# Altium PCB Cap_ESP_ADS1298.PcbDoc
Units mil, origin at the board's own origin, x right, y up, seen from the top; angles counter-clockwise.
Board outline 915 x 1330 mil, 4 copper layers (Top Layer, VDD, GND, Bottom Layer), stack 30.634 mil thick; 110 components, 86 nets, 404 pads, 76 vias.
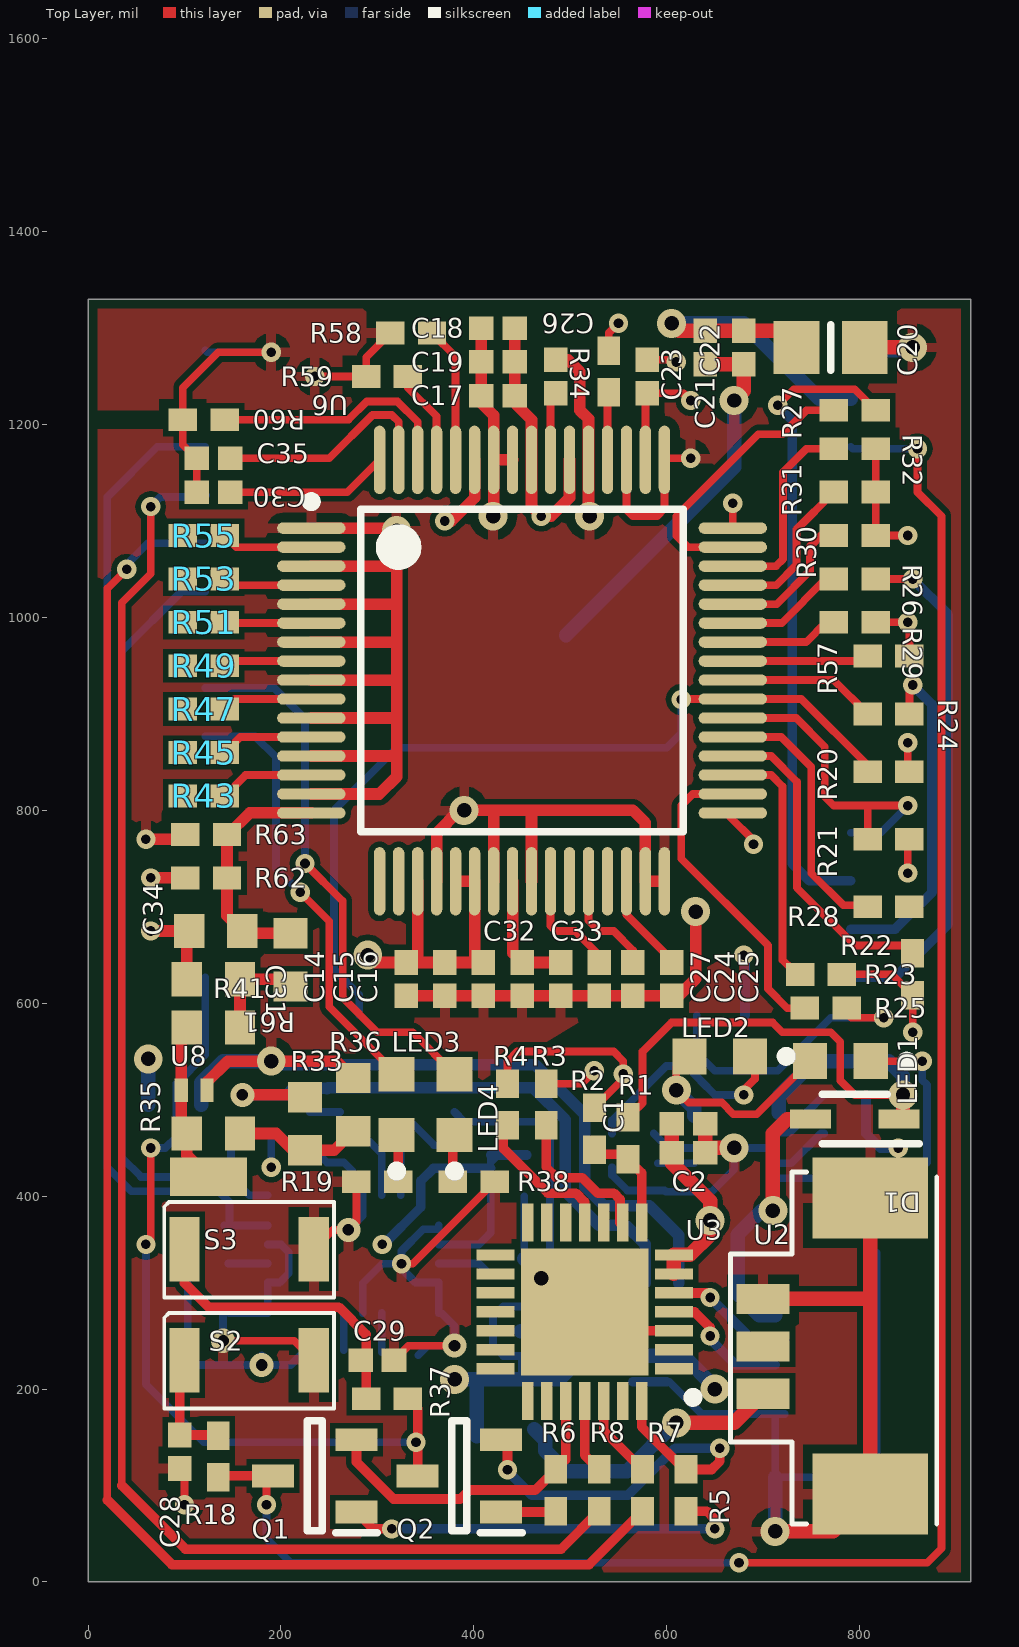
[diagram p0: Top Layer view]
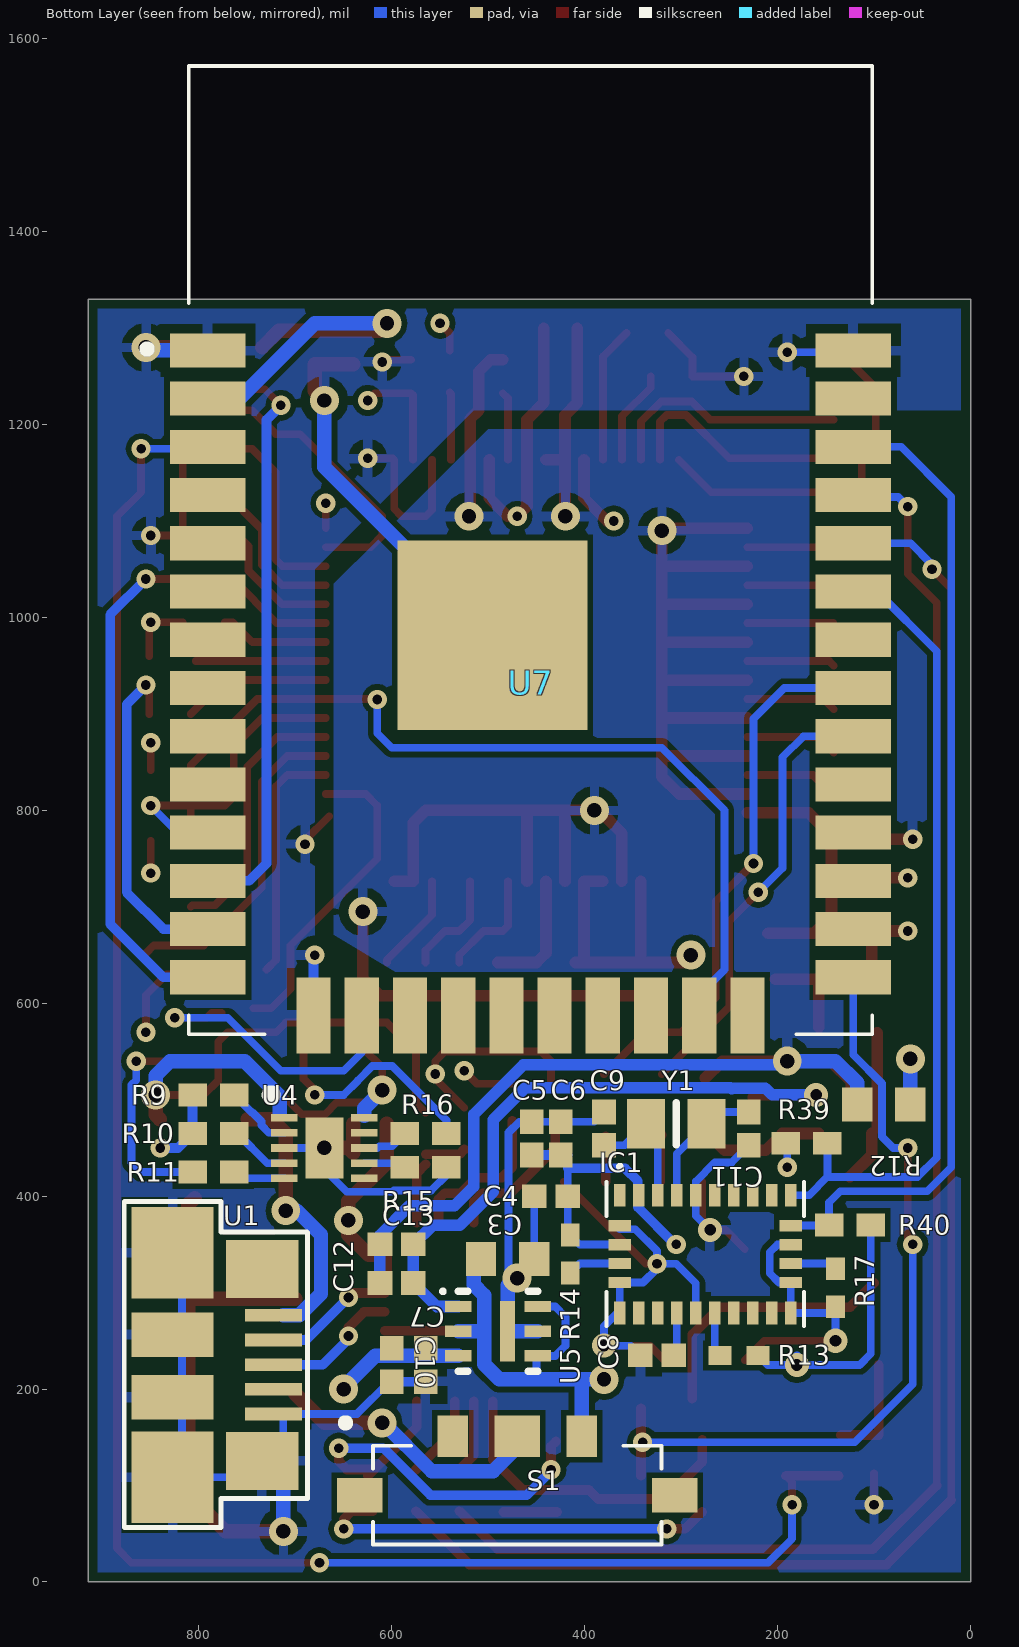
[diagram p1: Bottom Layer view, seen from below]
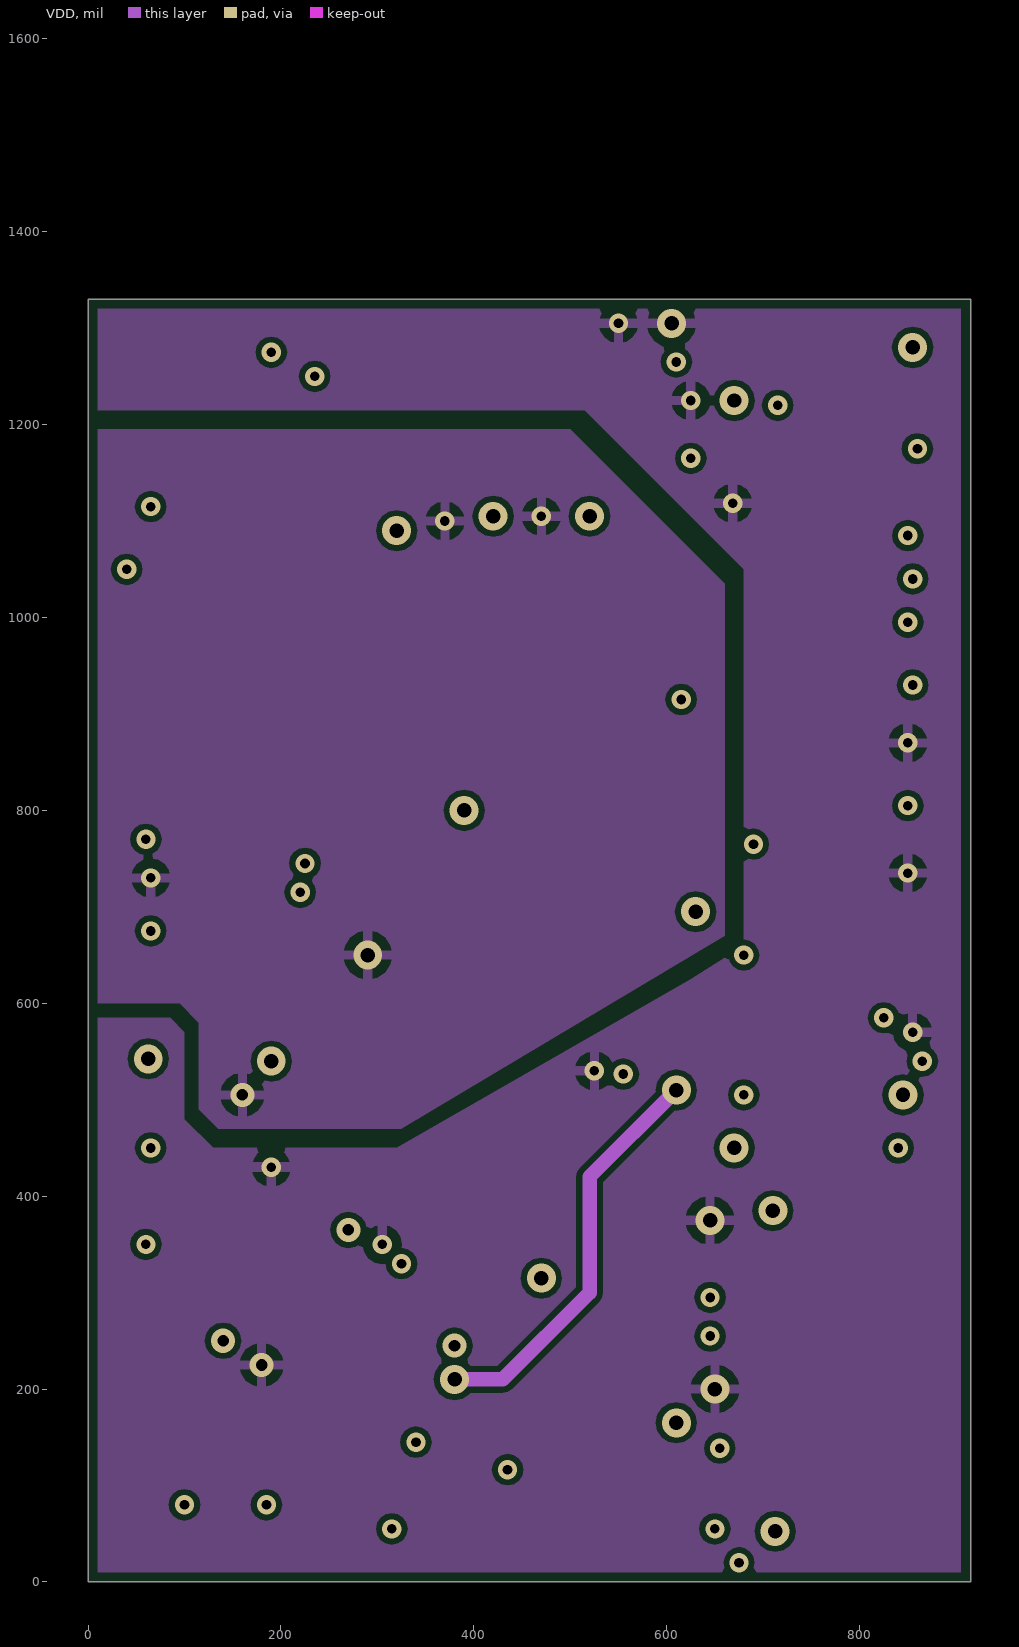
[diagram p2: VDD]
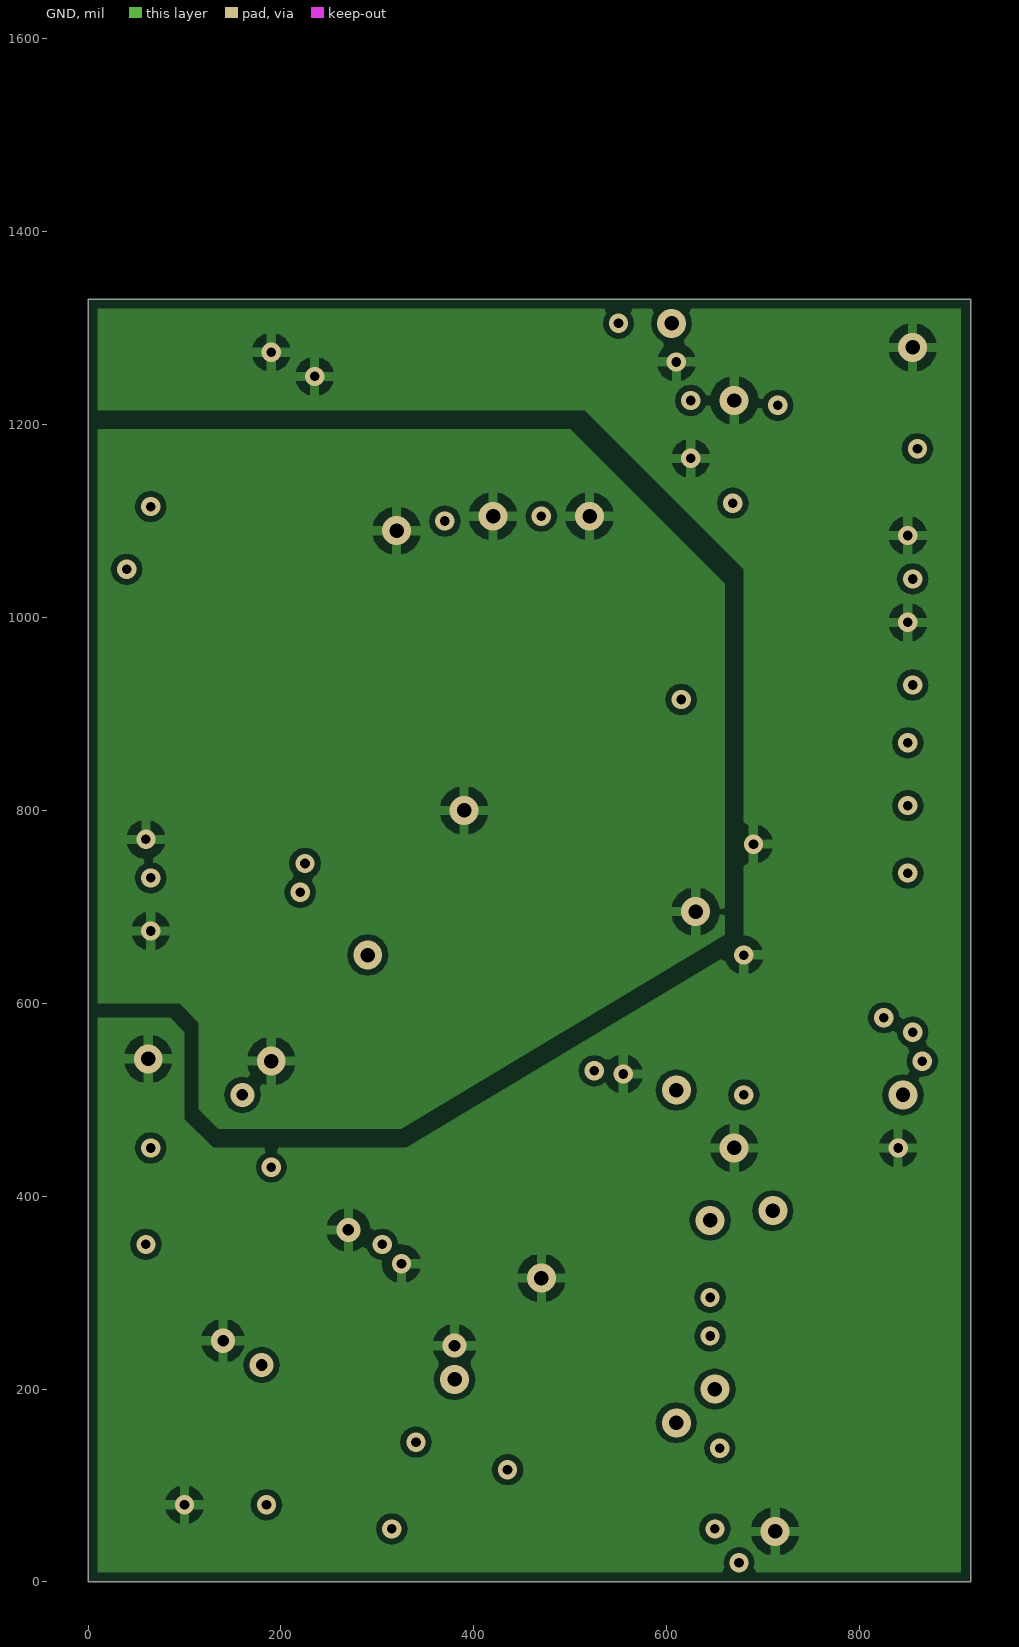
[diagram p3: GND]
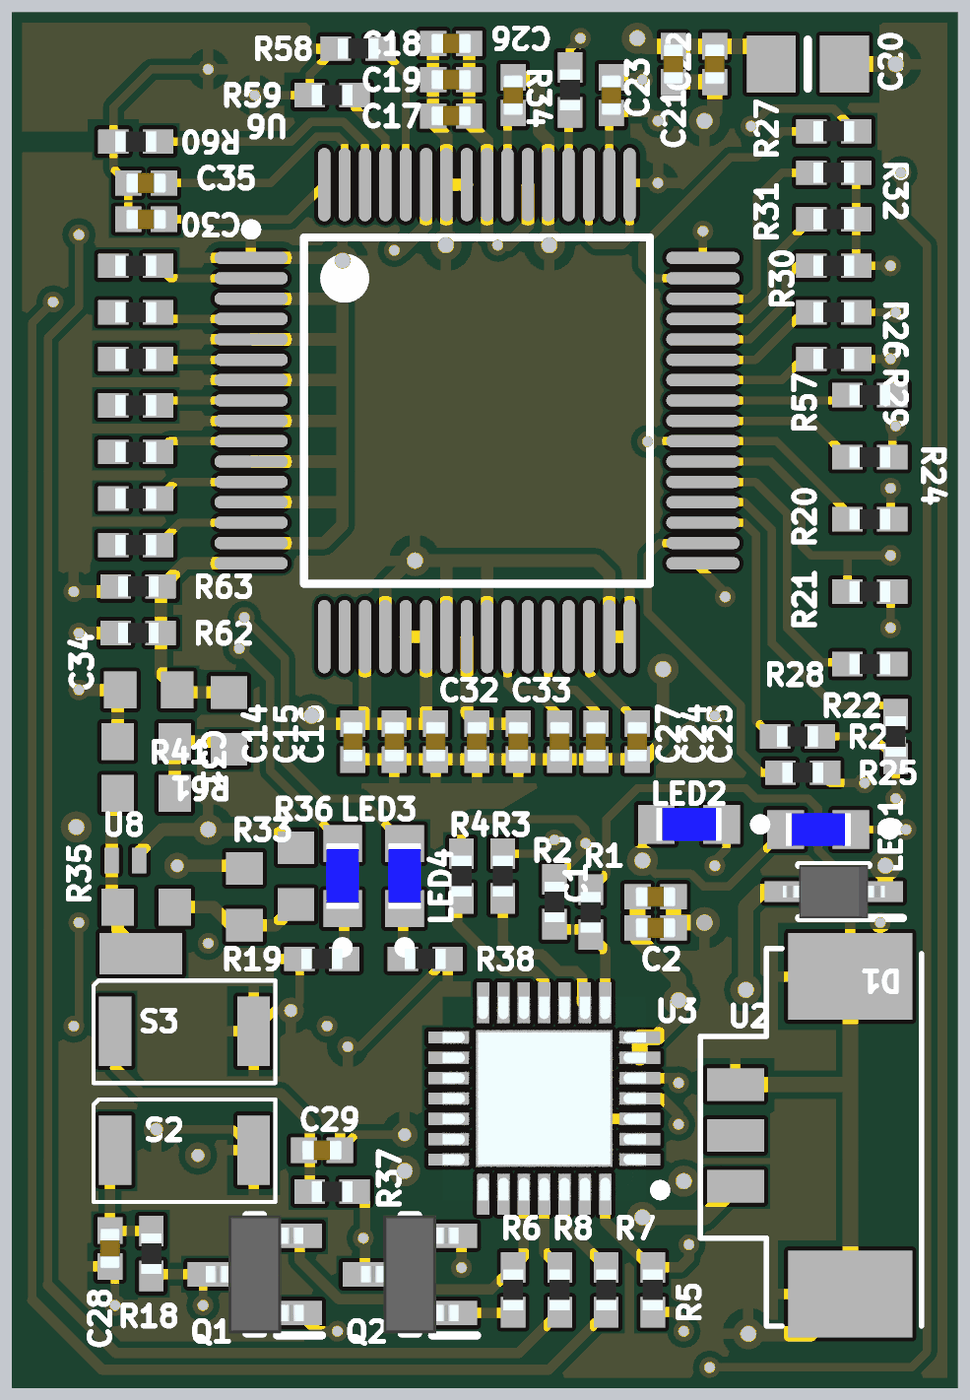
[diagram p4: 3D render of the assembled board from above, using the file's embedded part models]
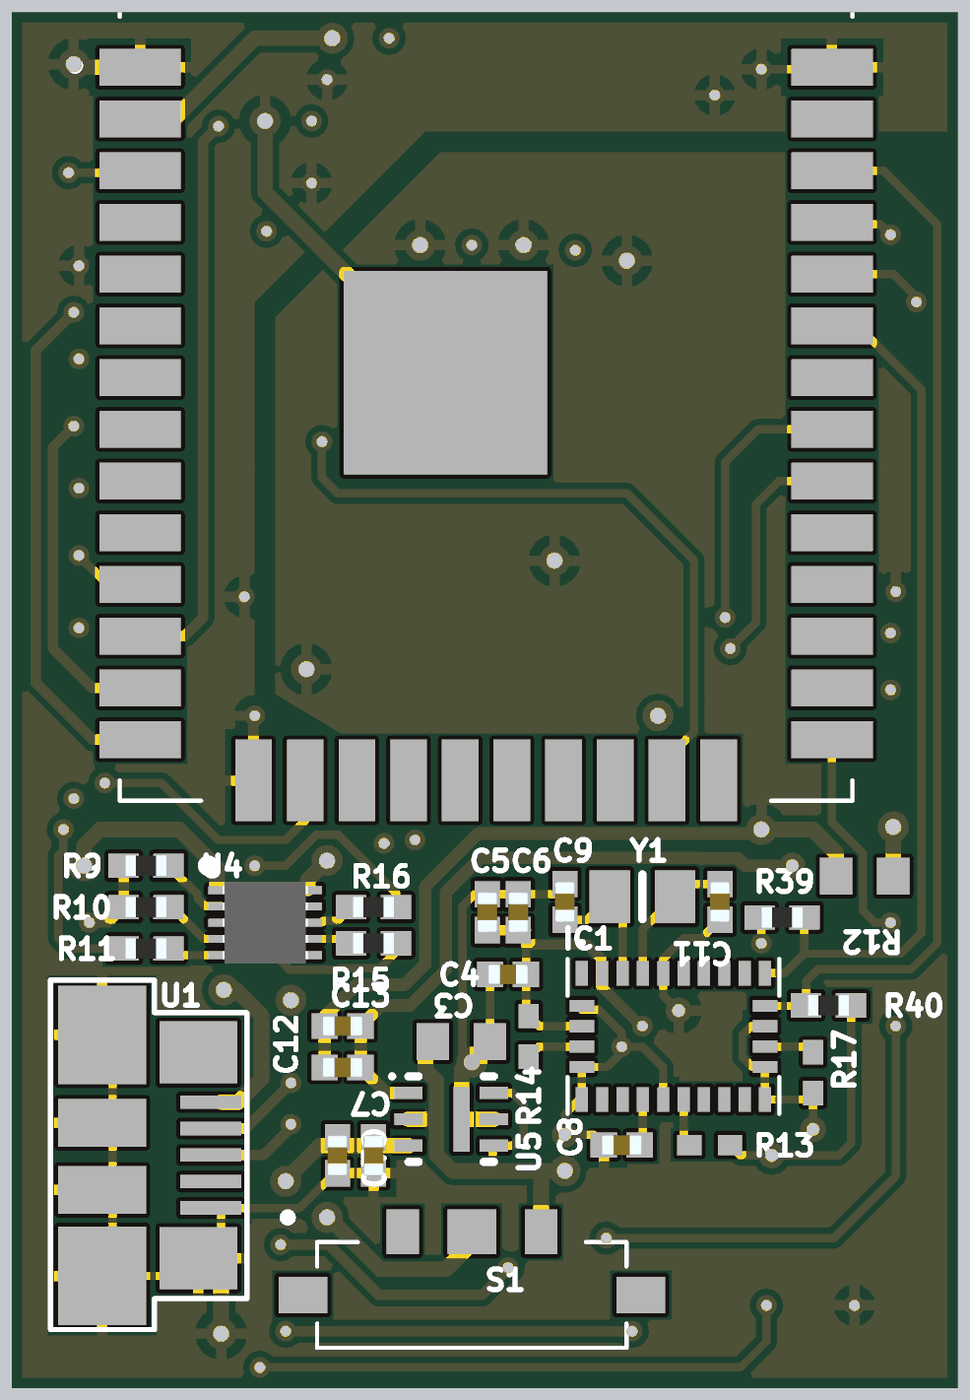
[diagram p5: 3D render of the assembled board from below, using the file's embedded part models]

## Layer stack, top to bottom
Top Solder: solder mask 0.4, Solder Resist, Dk 3.5
Top Layer: signal copper 1.4
Dielectric 1: core 10, FR-4, Dk 4.2
VDD: signal copper 1.417
Dielectric 3: prepreg 5, Dk 4.2
GND: signal copper 1.417
Dielectric 2: core 10, Dk 4.2
Bottom Layer: signal copper 1.4
Bottom Solder: solder mask 0.4, Solder Resist, Dk 3.5

## Board outline
0,0 0,1330 915,1330 915,0

## Design rules (kind name [scope] priority, off if disabled: settings)
Clearance [All] p1: gap=6 ignorepadtopadclearanceinfootprint=FALSE
MinimumSolderMaskSliver [All] p1: minsoldermaskwidth=0
PlaneClearance [All] p1: clearance=10
PlaneConnect [All] p1: planeconnectstyle=Relief reliefexpansion=10 reliefentries=4 reliefconductorwidth=8 reliefairgap=8
PolygonConnect [All] p1: connectstyle=Relief reliefconductorwidth=10 reliefentries=4 polygonreliefangle="90 Angle" airgapwidth=10
RoutingVias [All] p1: holewidth=10 width=20 viastyle="Through Hole" minholewidth=10 minwidth=20 maxholewidth=28 maxwidth=50
SilkToSilkClearance [All] p1: silktosilkclearance=0
SilkToSolderMaskClearance [IsPad] p1: minsilkscreentomaskgap=0 clearancetoexposedcopper=TRUE
SolderMaskExpansion [All] p1: expansion=4
Width [All] p1: maxlimit=20 minlimit=8 preferedwidth=10
25 further rules are at their usual default settings.

## Components (designator, comment, footprint, x,y, rotation, side; value= is the part's Value field where it differs from the comment)
C1 "4.7uF" CAPC1005X55N 622.68,475 r180 top
C2 "0.1uF" CAPC1005X55N 622.68,445 r180 top
C3 "4.7uF" 1608[0603] 480,335 r0 bottom
C4 "0.1uF" CAPC1005X55N 435,400 r180 bottom
C5 "6.8nF" CAPC1005X55N 455,460 r270 bottom
C6 "0.1uF" CAPC1005X55N 425,460 r270 bottom
C7 "1uF" CAPC1005X55N 565,225 r90 bottom
C8 "0.1uF" CAPC1005X55N 325,235 r0 bottom
C9 "22pF" CAPC1005X55N 380,470 r270 bottom
C10 "10nF" CAPC1005X55N 600,225 r90 bottom
C11 "22pF" CAPC1005X55N 230,470 r90 bottom
C12 "1uF" CAPC1005X55N 595,310 r180 bottom
C13 "10nF" CAPC1005X55N 595,350 r180 bottom
C14 "0.1uF" CAPC1005X55N 410,625 r270 top
C15 "0.1uF" CAPC1005X55N 370,625 r270 top
C16 "0.1uF" CAPC1005X55N 330,625 r270 top
C17 "0.1uF" CAPC1005X55N 425,1230 r180 top
C18 "0.1uF" CAPC1005X55N 425,1300 r180 top
C19 "0.1uF" CAPC1005X55N 425,1265 r180 top
C20 "22uF" 6-0805_N 770,1280 r180 top
C21 "0.1uF" CAPC1005X55N 640,1280 r270 top
C22 "0.1uF" CAPC1005X55N 680,1280 r90 top
C23 "0.1uF" CAPC1005X55N 580,1250 r90 top
C24 "10uF" CAPC1005X55N 565,625 r90 top
C25 "0.1uF" CAPC1005X55N 605,625 r270 top
C26 "0.1uF" CAPC1005X55N 485,1250 r90 top
C27 "0.1uF" CAPC1005X55N 530,625 r270 top
C28 "0.1uF" CAPC1005X55N 95,135 r90 top
C29 "0.1uF" CAPC1005X55N 300,230 r180 top
C30 "0.1uF" CAPC1005X55N 130,1130 r0 top
C31 "33nF" 1608[0603] 130,625 r180 top
C32 "0.1uF" CAPC1005X55N 450,625 r90 top
C33 "0.1uF" CAPC1005X55N 490,625 r270 top
C34 "100nF" 1608[0603] 132.44,675 r180 top
C35 "0.1uF" CAPC1005X55N 130,1165 r0 top
D1 "BAT760-7" SOD2513X120N 795,480 r180 top
IC1 "BNO055" BNO055 275,340 r180 bottom
LED1 "SML-310VTT86" LEDC1608X80N 780,540 r180 top
LED2 "SML-310VTT86" LEDC1608X80N 655,545 r180 top
LED3 "SML-310VTT86" LEDC1608X80N 320,495 r90 top
LED4 "SML-310VTT86" LEDC1608X80N 380,495 r90 top
Q1 "SS8050-G" SOT95P240X115-3N 235,110 r180 top
Q2 "SS8050-G" SOT95P240X115-3N 385,110 r180 top
R1 "22.1k" RESC1005X40N 560,460 r90 top
R2 "47.5k" RESC1005X40N 525,470 r270 top
R3 "2k" RESC1005X40N 475,495 r270 top
R4 "10k" RESC1005X40N 435,495 r270 top
R5 "10k" RESC1005X40N 620,95 r90 top
R6 "10k" RESC1005X40N 485,95 r90 top
R7 "0" RESC1005X40N 575,95 r90 top
R8 "0" RESC1005X40N 530,95 r90 top
R9 "1k" RESC1005X40N 785,505 r180 bottom
R10 "1k" RESC1005X40N 785,465 r180 bottom
R11 "1k" RESC1005X40N 785,425 r180 bottom
R12 "0" 1608[0603] 90,495 r0 bottom
R13 "10k" 0402 240,235 r180 bottom
R14 "10k" 0402 415,340 r90 bottom
R15 "1k" RESC1005X40N 565,430 r0 bottom
R16 "1k" RESC1005X40N 565,465 r0 bottom
R17 "10k" 0402 140,305 r270 bottom
R18 "470" RESC1005X40N 135,130 r90 top
R19 "1k" RESC1005X40N 300,415 r0 top
R20 "10k" RESC1005X40N 830,840 r180 top
R21 "10k" RESC1005X40N 830,770 r180 top
R22 "10k" RESC1005X40N 855,630 r90 top
R23 "10k" RESC1005X40N 760,630 r180 top
R24 "10" RESC1005X40N 830,900 r0 top
R25 "10" RESC1005X40N 765,595 r0 top
R26 "10" RESC1005X40N 795,1040 r0 top
R27 "10" RESC1005X40N 795,1215 r0 top
R28 "0" RESC1005X40N 830,700 r0 top
R29 "0" RESC1005X40N 795,995 r0 top
R30 "0" RESC1005X40N 795,1085 r0 top
R31 "0" RESC1005X40N 795,1130 r0 top
R32 "0" RESC1005X40N 795,1175 r0 top
R33 "820" 1608[0603] 225,475 r90 top
R34 "10k" RESC1005X40N 540,1255 r270 top
R35 "2M" 1608[0603] 130,465 r0 top
R36 "820" 1608[0603] 275,495 r270 top
R37 "470" RESC1005X40N 310,190 r180 top
R38 "1k" RESC1005X40N 400,415 r180 top
R39 "10k" RESC1005X40N 170,455 r0 bottom
R40 "10k" RESC1005X40N 125,370 r180 bottom
R41 "200k" 1608[0603] 130,575 r180 top
R43 "0" RESC1005X40N 120,815 r0 top
R45 "0" RESC1005X40N 120,860 r0 top
R47 "0" RESC1005X40N 120,905 r0 top
R49 "0" RESC1005X40N 120,950 r0 top
R51 "0" RESC1005X40N 120,995 r0 top
R53 "0" RESC1005X40N 120,1040 r0 top
R55 "0" RESC1005X40N 120,1085 r0 top
R57 "10" RESC1005X40N 830,960 r180 top
R58 "10" RESC1005X40N 335,1295 r0 top
R59 "10" RESC1005X40N 310,1250 r0 top
R60 "10" RESC1005X40N 120,1205 r0 top
R61 "200k" 1608[0603] 210,645 r270 top
R62 "1M" RESC1005X40N 122.44,730 r180 top
R63 "1M" RESC1005X40N 122.44,775 r180 top
S1 "JSX08001SAQNL" JSX08001SAQNL 470,90 r180 bottom
S2 "SW-PB" SPSD_Switch_B3U100P 100,230 r0 top
S3 "SW-PB" SPSD_Switch_B3U100P 100,345 r0 top
U1 "Micro USB Type B" "Micro USB Type B" 775,225 r90 bottom
U2 "Battery" "Battery Header" 840,280 r90 top
U3 "CP2102N-A01-GQFN28" QFN50P500X500X80-29N-D 515,280 r180 top
U4 "BQ24045DSQR" SON40P200X200X80-11N 670,450 r180 bottom
U5 "TPS71933-33DRVR" TI-DRV6-1600X1000TP_V 490,260 r180 bottom
U6 "ADS1298IPAG" TI-PAG64_N 450,945 r0 top
U7 "ESP-WROOM-32_(16MB)" ESP32WROOM32D 470,1060 r180 bottom
U8 "TPD1E10B06DPYT" DPY2_N 110,510 r180 top
Y1 "XTAL" 6-0805_L 305,475 r0 bottom

## Footprints (in the part's own frame and the unit in brackets; to place one, negate y for a bottom-side part, rotate by r counter-clockwise, add the part's x,y. Pads: shape width x height; smd on the part's side, far side on the other; paste and mask are expansions set on the pad)
6-0805_L [mm] "Chip Resistor, Body 2.0x1.2mm, IPC High Density"
  rect 1x1.3 smd: 1(-0.8,0) 2(0.8,0)
  silkscreen extent 0,-0.55 0,0.55, body extent -1.07,-0.7 1.07,0.7, height 0.7
6-0805_N [mm] "Chip Resistor, Body 2.0x1.2mm, IPC Medium Density"
  rect 1.2x1.4 smd: 1(-0.9,0) 2(0.9,0)
  silkscreen extent 0,-0.6 0,0.6, body extent -1.07,-0.7 1.07,0.7, height 0.7
0402 [mm] "Chip Capacitor, Body 1.0x0.5mm, IPC High Density"
  rect 0.6x0.5 smd: 1(-0.5,0) 2(0.5,0)
  body extent -0.55,-0.3 0.55,0.3, height 1.3
1608[0603] [mm] "Chip Capacitor, Body 1.6x0.8mm, IPC High Density"
  rect 0.8x0.9 smd: 1(-0.7,0) 2(0.7,0)
  body extent -0.87,-0.48 0.87,0.48, height 1.3
"Battery Header" [mil]
  rect 31.5x55.12 smd: 1(-85,140) 2(-35.79,140) 3(13.43,140)
  rect 84x120 smd: 4(118,29) 5(-189,29)
  silkscreen extent -220,-40 145,174
BNO055 [mm]
  rect 0.3x0.6 smd: 1(-2.25,1.55) 6(-2.25,-1.55) 7(-1.75,-1.55) 8(-1.25,-1.55) 9(-0.75,-1.55) 10(-0.25,-1.55) 11(0.25,-1.55) 12(0.75,-1.55) 13(1.25,-1.55) 14(1.75,-1.55) 15(2.25,-1.55) 20(2.25,1.55) 21(1.75,1.55) 22(1.25,1.55) 23(0.75,1.55) 24(0.25,1.55) 25(-0.25,1.55) 26(-0.75,1.55) 27(-1.25,1.55) 28(-1.75,1.55)
  rect 0.6x0.3 smd: 2(-2.25,0.75) 3(-2.25,0.25) 4(-2.25,-0.25) 5(-2.25,-0.75) 16(2.25,-0.75) 17(2.25,-0.25) 18(2.25,0.25) 19(2.25,0.75)
  silkscreen extent -2.6,-1.9 2.6,2.35
CAPC1005X55N [mm]
  rect 0.65x0.62 smd: 1(-0.44,0) 2(0.44,0)
  body extent -0.5,-0.25 0.5,0.25, height 0.55
DPY2_N [mm] "DFN, 2-Leads, Body 1.0x0.6x0.4mm, IPC Medium Density"
  rect 0.35x0.62 smd: 1(-0.34,0) 2(0.34,0)
  body extent -0.5,-0.3 0.5,0.3, height 0.4
ESP32WROOM32D [mm]
  rect 2x0.9 smd: 1(-8.15,5.51) 2(-8.15,4.24) 3(-8.15,2.97) 4(-8.15,1.7) 5(-8.15,0.43) 6(-8.15,-0.84) 7(-8.15,-2.11) 8(-8.15,-3.38) 9(-8.15,-4.65) 10(-8.15,-5.92) 11(-8.15,-7.19) 12(-8.15,-8.46) 13(-8.15,-9.73) 14(-8.15,-11) 25(8.85,-11) 26(8.85,-9.73) 27(8.85,-8.46) 28(8.85,-7.19) 29(8.85,-5.92) 30(8.85,-4.65) 31(8.85,-3.38) 32(8.85,-2.11) 33(8.85,-0.84) 34(8.85,0.43) 35(8.85,1.7) 36(8.85,2.97) 37(8.85,4.24) 38(8.85,5.51)
  rect 0.9x2 smd: 15(-5.365,-12) 16(-4.095,-12) 17(-2.825,-12) 18(-1.555,-12) 19(-0.285,-12) 20(0.985,-12) 21(2.255,-12) 22(3.525,-12) 23(4.795,-12) 24(6.065,-12)
  rect 5x5 smd: 39(-0.65,-1.99)
  silkscreen extent -9.85,-12.5 9.35,13
JSX08001SAQNL [mm]
  rect 0.8x1.1 smd: 1(-1.7,1.55) 2(1.7,1.55)
  rect 1.2x1.1 smd: C1(0,1.55)
  rect 1.2x0.9 smd: MP1(-4.15,0) MP2(4.15,0)
  silkscreen extent -4.62,-1.3 3.8,2
LEDC1608X80N [mm]
  rect 0.9x0.95 smd: 1(-0.8,0) 2(0.8,0)
  silkscreen extent -1.88,-0.12 -1.63,0.12, body extent -0.8,-0.4 0.8,0.4, height 0.8
"Micro USB Type B" [mil]
  rect 13.07x59.06 smd: 1(51.5,-52.5) 2(25.91,-52.5) 3(0.32,-52.5) 4(-25.27,-52.5) 5(-50.86,-52.5)
  rect 60x75.12 smd: 6(-99.5,-40.5) 11(99.5,-40.5)
  rect 95x85 smd: 7(-116.5,52.5) 10(116.5,52.5)
  rect 46x85 smd: 8(-33.5,52.5) 9(31.5,52.5)
  silkscreen extent -168,-88 170,103
QFN50P500X500X80-29N-D [mm]
  rect 1x0.3 smd: 1(-2.35,1.5) 2(-2.35,1) 3(-2.35,0.5) 4(-2.35,0) 5(-2.35,-0.5) 6(-2.35,-1) 7(-2.35,-1.5) 15(2.35,-1.5) 16(2.35,-1) 17(2.35,-0.5) 18(2.35,0) 19(2.35,0.5) 20(2.35,1) 21(2.35,1.5)
  rect 0.3x1 smd: 8(-1.5,-2.35) 9(-1,-2.35) 10(-0.5,-2.35) 11(0,-2.35) 12(0.5,-2.35) 13(1,-2.35) 14(1.5,-2.35) 22(1.5,2.35) 23(1,2.35) 24(0.5,2.35) 25(0,2.35) 26(-0.5,2.35) 27(-1,2.35) 28(-1.5,2.35)
  rect 3.35x3.35 smd: 29(0,0)
  silkscreen extent -2.98,2.13 -2.73,2.37, body extent -2.55,-2.55 2.55,2.55, height 0.8
RESC1005X40N [mm]
  rect 0.75x0.6 smd: 1(-0.55,0) 2(0.55,0)
  body extent -0.5,-0.25 0.5,0.25, height 0.4
SOD2513X120N [mm]
  rect 1.075x0.5 smd: 1(-1.162,0) 2(1.162,0)
  silkscreen extent -1.7,-0.65 0.85,0.65, body extent -1.25,-0.65 1.25,0.65, height 1.2
SON40P200X200X80-11N [mm]
  rect 0.7x0.2 smd: 1(-1.05,0.8) 2(-1.05,0.4) 3(-1.05,0) 4(-1.05,-0.4) 5(-1.05,-0.8) 6(1.05,-0.8) 7(1.05,-0.4) 8(1.05,0) 9(1.05,0.4) 10(1.05,0.8)
  rect 1x1.6 smd: 11(0,0)
  silkscreen extent -1.53,1.28 -1.28,1.52, body extent -1.05,-1 1.05,1, height 0.8
SOT95P240X115-3N [mm]
  rect 1.1x0.6 smd: 1(-1.1,0.95) 2(-1.1,-0.95) 3(1.1,0)
  silkscreen extent -1.65,-1.45 0.2,1.5, body extent -1.2,-1.45 1.2,1.45, height 1.15
SPSD_Switch_B3U100P [mm]
  rect 0.8x1.7 smd: 1(0,0) 2(3.404,0)
  silkscreen extent -0.53,-1.27 3.94,1.24
TI-DRV6-1600X1000TP_V [mm] "SON, 6-Leads, Body 2x2mm, Pitch 0.65mm, Thermal Pad 1X1.6mm"
  rect 0.7x0.3 smd: 1(-1.05,0.65) 2(-1.05,0) 3(-1.05,-0.65) 4(1.05,-0.65) 5(1.05,0) 6(1.05,0.65)
  rect 0.4x1.6 smd: 7(0.254,0)
  silkscreen extent -1.5,-1.05 1.05,1.1, body extent -1,-1 1,1, height 0.8
TI-PAG64_N [mm] "QFP, 64-Leads, Body 10x10mm, Pitch 0.5mm, IPC Medium Density"
  oval 1.8x0.3 smd: 1(-5.55,3.75) 2(-5.55,3.25) 3(-5.55,2.75) 4(-5.55,2.25) 5(-5.55,1.75) 6(-5.55,1.25) 7(-5.55,0.75) 8(-5.55,0.25) 9(-5.55,-0.25) 10(-5.55,-0.75) 11(-5.55,-1.25) 12(-5.55,-1.75) 13(-5.55,-2.25) 14(-5.55,-2.75) 15(-5.55,-3.25) 16(-5.55,-3.75) 33(5.55,-3.75) 34(5.55,-3.25) 35(5.55,-2.75) 36(5.55,-2.25) 37(5.55,-1.75) 38(5.55,-1.25) 39(5.55,-0.75) 40(5.55,-0.25) 41(5.55,0.25) 42(5.55,0.75) 43(5.55,1.25) 44(5.55,1.75) 45(5.55,2.25) 46(5.55,2.75) 47(5.55,3.25) 48(5.55,3.75)
  oval 0.3x1.8 smd: 17(-3.75,-5.55) 18(-3.25,-5.55) 19(-2.75,-5.55) 20(-2.25,-5.55) 21(-1.75,-5.55) 22(-1.25,-5.55) 23(-0.75,-5.55) 24(-0.25,-5.55) 25(0.25,-5.55) 26(0.75,-5.55) 27(1.25,-5.55) 28(1.75,-5.55) 29(2.25,-5.55) 30(2.75,-5.55) 31(3.25,-5.55) 32(3.75,-5.55) 49(3.75,5.55) 50(3.25,5.55) 51(2.75,5.55) 52(2.25,5.55) 53(1.75,5.55) 54(1.25,5.55) 55(0.75,5.55) 56(0.25,5.55) 57(-0.25,5.55) 58(-0.75,5.55) 59(-1.25,5.55) 60(-1.75,5.55) 61(-2.25,5.55) 62(-2.75,5.55) 63(-3.25,5.55) 64(-3.75,5.55)
  silkscreen extent -5.67,-4.25 4.25,4.57, body extent -5,-5 5,5, height 1.2

## Part data
C1 C2 C3 C4 C5 C6 C7 C8 C9 C10 C11 C12 C13 C14 C15 C16 C17 C18 C19 C20 C21 C22 C23 C24 C25 C26 C27 C28 C29 C30 C31 C32 C33 C34 C35: library part C0402C829D3GACTU, "Capacitor", Manufacturer_Name=Kemet, Mouser Part Number=80-C0402C829D3G, Datasheet Link=https://content.kemet.com/datasheets/KEM_C1002_X7R_SMD.pdf, Height=0.55mm, Manufacturer_Part_Number=C0402C829D3GACTU, Mouser Price/Stock=https://www.mouser.com/Search/Refine.aspx?Keyword=80-C0402C829D3G
D1: "Schottky Diode", Manufacturer_Name="Diodes Inc.", Mouser Part Number=621-BAT760-7, Datasheet Link=https://componentsearchengine.com/Datasheets/1/BAT760-7.pdf, Height=1.2mm, Manufacturer_Part_Number=BAT760-7, Mouser Price/Stock=https://www.mouser.com/Search/Refine.aspx?Keyword=621-BAT760-7
IC1: "Integrated Circuit", Manufacturer_Name="Bosch Sensortec", Mouser Part Number=262-BNO055, Datasheet Link=https://componentsearchengine.com/Datasheets/1/BNO055.pdf, Height=1mm, Manufacturer_Part_Number=BNO055, Mouser Price/Stock=https://www.mouser.com/Search/Refine.aspx?Keyword=262-BNO055
LED1 LED2 LED3 LED4: "LED", Manufacturer_Name="ROHM Semiconductor", Mouser Part Number=755-SML-310VTT86, RS Part Number=7007926P, Allied_Number=70522033, Allied Price/Stock=http://www.alliedelec.com/rohm-semiconductor-sml-310vtt86/70522033/, Datasheet Link=http://www.rohm.co.jp/documents/11401/2613878/2014E_LED.pdf, Height=0.8mm, Manufacturer_Part_Number=SML-310VTT86, Mouser Price/Stock=https://www.mouser.com/Search/Refine.aspx?Keyword=755-SML-310VTT86, RS Price/Stock=http://uk.rs-online.com/web/p/products/7007926P
Q1 Q2: "Transistor BJT NPN", Manufacturer_Name="Comchip Technology", Mouser Part Number=750-SS8050-G, Datasheet Link=https://componentsearchengine.com/Datasheets/1/SS8050-G.pdf, Height=1.15mm, Manufacturer_Part_Number=SS8050-G, Mouser Price/Stock=https://www.mouser.com/Search/Refine.aspx?Keyword=750-SS8050-G
R1 R2 R3 R4 R5 R6 R7 R8 R9 R10 R11 R12 R13 R14 R15 R16 R17 R18 R19 R20 R21 R22 R23 R24 R25 R26 R27 R28 R29 R30 R31 R32 R33 R34 R35 R36 R37 R38 R39 R40 R41 R43 R45 R47 R49 R51 R53 R55 R57 R58 R59 R60 R61 R62 R63: library part CRCW040295R3FKED, "Resistor", Manufacturer_Name=Vishay, Mouser Part Number=71-CRCW040295R3FKED, Datasheet Link=http://www.vishay.com/docs/20035/dcrcwe3.pdf, Height=0.4mm, Manufacturer_Part_Number=CRCW040295R3FKED, Mouser Price/Stock=https://www.mouser.com/Search/Refine.aspx?Keyword=71-CRCW040295R3FKED
S1: "Switch", Manufacturer_Name="C&K Switches", Mouser Part Number=611-JSX08001SAQNL, Datasheet Link=https://www.mouser.com/datasheet/2/60/jsx-965351.pdf, Height=1.2mm, Manufacturer_Part_Number=JSX08001SAQNL
S2 S3: "Switch", LatestRevisionDate=17-Jul-2002, LatestRevisionNote="Re-released for DXP Platform.", PackageDescription="Switch; 2 Leads", PackageReference=SPST-2, Published=24-Mar-1999, Publisher="Altium Limited"
U2: library part "Battery Header"
U3: "Integrated Circuit", Manufacturer_Name="Silicon Labs", Mouser Part Number=634-CP2102NA01GQFN28, Datasheet Link=https://componentsearchengine.com/Datasheets/1/CP2102N-A01-GQFN28.pdf, Height=0.8mm, Manufacturer_Part_Number=CP2102N-A01-GQFN28, Mouser Price/Stock=https://www.mouser.com/Search/Refine.aspx?Keyword=634-CP2102NA01GQFN28
U4: "Integrated Circuit", Manufacturer_Name="Texas Instruments", Mouser Part Number=595-BQ24045DSQR, Datasheet Link=http://www.ti.com/lit/gpn/bq24045, Height=0.8mm, Manufacturer_Part_Number=BQ24045DSQR, Mouser Price/Stock=https://www.mouser.com/Search/Refine.aspx?Keyword=595-BQ24045DSQR
U5: "Dual Output High PSRR LDO, 200 mA, Fixed 3.3 V Output, 2.7 to 6.5 V Input, 6-pin SON (DRV), -40 to 125 degC, Green (RoHS & no Sb/Br)", Manufacturer="Texas Instruments", Supplier Part Number 1=296-21662-2-ND, ComponentLink1Description="Manufacturer URL", ComponentLink1URL=http://www.ti.com/, ComponentLink2Description=Datasheet, ComponentLink2URL=http://www.ti.com/general/docs/lit/getliterature.tsp?genericPartNumber=TPS71933-33&fileType=pdf, ComponentLink3Description="Package Specification", ComponentLink3URL=http://www.ti.com/litv/pdf/mpds216d, DatasheetVersion=SBVS088C, Eco-Plan="Green (RoHS & no Sb/Br)", Fixed Output Options(V)=3.3, Iout2(A)=0.2, Iout(Max)(A)=0.2, Iq(Typ)(mA)=0.09, Mounting Technology="Surface Mount", PackageDescription="6-Pin Plastic Small Outline No-Lead, Body 2 x 2 mm, Pitch 0.65 mm", PackageReference=DRV6-1600X1000TP, PackageVersion=4206925/E, PartNumber=TPS71933-33DRVR, SubFamily="Dual Channel LDO", Supplier 1=Digi-Key, Supplier 2=Digi-Key, Supplier 3=Digi-Key, Supplier 4=Newark, Supplier 5=Mouser, Supplier Part Number 2=296-21662-1-ND, Supplier Part Number 3=296-21662-6-ND, Supplier Part Number 4=37M0080, Supplier Part Number 5=595-TPS71933-33DRVR, Vdo(Typ)(mV)=230, Vin(Max)(V)=6.5, Vin(Min)(V)=2.7, Vout2(Max)(V)=3.3, Vout2(Min)(V)=3.3, Vout(Max)(V)=3.3, Vout(Min)(V)=3.3
U6: "8-Channel, 24-Bit ADC with Integrated ECG Front End, -40 to 85 degC, 64-pin QFP (PAG64), Green (RoHS & no Sb/Br)", Analog Voltage AV/DD(Max)(V)=5.25, Analog Voltage AV/DD(Min)(V)=2.7, Manufacturer="Texas Instruments", Supplier Part Number 1=ADS828E/1K-ND, # Input Channels=8, Architecture=Delta-Sigma, Code_JEDEC=MS-026, ComponentLink1Description="Manufacturer URL", ComponentLink1URL=http://www.ti.com/, ComponentLink2Description=Datasheet, ComponentLink2URL=http://www.ti.com/general/docs/lit/getliterature.tsp?genericPartNumber=ADS1298&fileType=pdf, ComponentLink3Description="Package Specification", ComponentLink3URL=http://www.ti.com/lit/ml/mtqf006a/mtqf006a.pdf, DatasheetVersion=SBAS459I, Digital Supply(Max)(V)=3.6, Digital Supply(Min)(V)=1.65, Eco-Plan="Green (RoHS & no Sb/Br)", Interface="Serial SPI", Mounting Technology="Surface Mount", PackageDescription="64-Pin Plastic Flat Pack, Body 10 x 10 mm, Pitch 0.50 mm", PackageReference=PAG64, PackageVersion="4040282/C, 11/1996", PartNumber=ADS1298IPAG, Resolution(Bits)=24, Sample Rate (max)(SPS)=32K, SNR(dB)=112, SubFamily="Precision ADC (<=10MSPS)", Supplier 1=Digi-Key, Supplier 2=Mouser, Supplier Part Number 2=595-ADS828E/1K
U7: "Integrated Circuit", Manufacturer_Name=Espressif, Manufacturer_Part_Number="ESP-WROOM-32 (16MB)", Mouser Part Number=356-ESPWROOM3216MB, Datasheet Link=https://www.mouser.com/datasheet/2/891/esp-wroom-32_datasheet_en-1365813.pdf, Height=3.1mm
U8: "ESD Protection in 0402 Package with 10 pF Capacitance and 6 V Breakdown, 1 Channel, -40 to +125 degC, 2-pin X2SON (DPY)", Breakdown Voltage(Min)(V)=6, IO Capacitance(Typ)(pF)=10, Manufacturer="Texas Instruments", Supplier Part Number 1=N/A, ComponentLink1Description=Datasheet, ComponentLink1URL=http://www.ti.com/general/docs/lit/getliterature.tsp?genericPartNumber=TPD1E10B06&fileType=pdf, ComponentLink2Description="URL Link1", ComponentLink2URL=SamplesURL:http://www.ti.com/product/tpd1e10b06#samples, DatasheetVersion=SLLSEB1, Eco-Plan=TBD, IEC 61000-4-2 Air-Gap(+/- kV)=30, IEC 61000-4-2 Contact(+/- kV)=30, IO Leakage Current(nA)=10, Mounting Technology="Surface Mount", PackageDescription="2-Pin Plastic Small Outline No-Lead 1.0 x 0.6 x 0.4 mm Body", PackageReference=DPY2, PackageVersion="revA, Apr-2010", PartNumber=TPD1E10B06DPYT, SubFamily="ESD Solution", Supplier 1=Mouser
Y1: "Crystal Oscillator", LatestRevisionDate=17-Jul-2002, LatestRevisionNote="Re-released for DXP Platform.", PackageDescription="Crystal, Thru-Hole; 2 Leads; Body 3.1 x 8.2 mm (Dia.xH)", PackageReference=R38, Published=8-Jun-2000, Publisher="Altium Limited"

## Free pads (board coordinates)
  rect 80x40 smd: 1(125,420)

## Via types
v1: diameter 20, hole 10, Top Layer to Bottom Layer, tented both sides, 50 vias
v2: diameter 30, hole 15, Top Layer to Bottom Layer, tented both sides, 21 vias
v3: diameter 25, hole 12, Top Layer to Bottom Layer, tented both sides, 5 vias

## Nets (pads, with @x,y where several pads share a name; then routed paths per layer and width w, separated by ;. In a path a pad name is that pad's centre, name@x,y a point inside that pad or via, vN(x,y) a via of type N, cw(c..) or ccw(c..) an arc to the next point about the centre after c; other vN are vias at no path point)
ADC_CS: R20.2 U6.39 U7.23 | length 879.5
  Top Layer w8: v1@615.47,915.47 U6.39 739.53,915.47 808.35,846.65 R20.2
  Bottom Layer w8: U7.23 281.22,608.79 255,635.01 255,800 320,865 600,865 615,880 v1(615,915)
ADC_DRDY: R27.2 U7.12 | length 667.2
  Top Layer w8: v1(715,1220) 731.81,1236.81 794.84,1236.81 R27.2
  Bottom Layer w10: v1(715,1220) 730,1205 730,745 748.07,726.93 U7.12
ADC_MISO: R26.2 U7.14 | length 535.6
  Top Layer w8: R26.2 v1(855,1040)
  Bottom Layer w10: U7.14 836.93,626.93 892,682 892,1003 v1(855,1040)
ADC_MOSI: R25.2 U7.16 | length 313.5
  Top Layer w8: R25.2@776.65,590 786.65,590 791.65,585 v1(825,585)
  Bottom Layer w8: U7.16 631.22,548.78 650,530 715,530 770,585 v1(825,585)
ADC_SCLK: R24.2 U7.13 | length 349.8
  Top Layer w8: R24.2 v1@851.65,926.65
  Bottom Layer w10: U7.13 836.93,676.93 875,715 875,910 v1(855,930)
ADC_START: R21.2 U6.38 U7.11 | length 355.8
  Top Layer w8: U6.38 734.21,895.79 764,866 764,814.35 773.35,805 810,805 ; R21.2 808.35,803.35 810,805 ; v1(850,805) 810,805
  Bottom Layer w8: U7.11 821.93,776.93 v1(850,805)
AGND: C12.1 C13.1 C14.2 C15.2 C16.2 C17.2 C18.2 C19.2 C24.1 C25.2 C26.2 C27.2 C31.2 C32.1 C33.2 C34.2 R12.2 R36.1 R63.2 U6.1 U6.3 U6.5 U6.7 U6.9 U6.11 U6.13 U6.15 U6.20 U6.23 U6.25 U6.31 U6.32 U6.53 U6.57 U6.58 U8.1 | length 3227.3
  Top Layer w12: v1(60,770) R63.2@95.79,770 ; v1(65,675) C34.2@100,675 ; C31.2 C34.2@102.44,672.56 ; U8.1 123.39,518.39 145,540 v2(190,540) 257.56,540 R36.1 ; U6.15 302.05,817.05 320,835 v2(320,1090) ; U6.13 318.58,856.42 ; U6.11 319.21,895.79 ; U6.9 315.16,935.16 ; U6.7 319.53,974.53 ; U6.5 316.1,1013.9 ; U6.3 318.27,1053.27 ; U6.1 v2@317.36,1092.64 ; C16.2 C15.2 C14.2 C32.1 C33.2 C27.2 C24.1 C25.2 612.32,607.68 630,625.35 v2(630,695) ; U6.20 361.42,776.42 385,800 v2(390,800) 565,800 577.95,787.05 U6.31 U6.32 ; C18.2 C19.2 C17.2 407.68,1222.68 420.47,1209.88 U6.58 ; U6.23 420.47,799.53 ; v2@420.47,1105.47 U6.58 ; U6.57 U6.58 ; U6.25 459.84,794.84 ; C26.2 497.68,1267.32 510,1255 510,1215 518.9,1206.1 U6.53 v2@518.9,1105
  Bottom Layer w12: v2(190,540) 193.81,536.19 463.56,536.19 515,484.75 515,410 535,390 581.82,390 612.32,359.49 C13.1 C12.1
  Bottom Layer w15: R12.2 117.56,517.56 140,540 v2(190,540)
  other v2: 420,1105 520,1105
AV_33: C12.2 C13.2 C14.1 C15.1 C16.1 C17.1 C18.1 C19.1 R33.2 R62.2 U5.1 U6.19 U6.21 U6.22 U6.54 U6.56 U6.59 | length 1401
  Top Layer w12: v1(65,730) R62.2 ; v3(160,505) 222.56,505 R33.2 ; v2(290,650) 297.68,642.32 C16.1 C15.1 C14.1 ; C16.1@341.73,645.59 U6.19 ; v1(370,1100) 376.82,1100 400.79,1123.97 U6.59 ; U6.21 U6.22 C14.1@400.79,643.11 ; C18.1 C19.1 C17.1 442.32,1222.68 459.84,1205.16 U6.56 459.84,1115.16 v1(470,1105) 480,1105 499.21,1124.21 U6.54
  Bottom Layer w12: v3(160,505) 205.71,505 212.82,512.12 247.18,512.12 247.78,511.52 248.85,512.59 461.7,512.59 495,479.29 495,404.54 529.54,370 557.68,370 C13.2 C12.2 553.27,285.59 U5.1
Cap: C8.1 IC1.9 | length 40.8
  Bottom Layer w8: C8.1@304.53,238.15 IC1.9
CTS: U3.23
DSR: U3.27
DTR: Q2.2 R5.2 U3.28 | length 434.1
  Top Layer w10: Q2.2@430,145.71 435,140.71 v1(435,116.41) ; U3.28 574.06,160.94 R5.2@625,110 ; R5.2 646.65,116.65 655,125 v1(655,138.72)
  Bottom Layer w10: v1(435,116.41) 435,115 445,105 460,90 560,90 608.72,138.72 v1(655,138.72)
EN: Q1.3 R18.1 U7.3 | length 2059.7
  Top Layer w8: v1(185,80) 185,103.31 Q1.3 ; v1(675,20) 870,20 885,35 885,1105 860,1130 v1(860,1175)
  Top Layer w10: R18.1@136.65,110 Q1.3
  Bottom Layer w8: v1(185,80) 185,45 210,20 v1(675,20) ; U7.3 792.8,1175 v1(860,1175)
EN_1: C28.2 R18.2 S2.1 | length 112
  Top Layer w10: S2.1@95,225 C28.2 R18.2@134.33,152.32
EXT_5V: D1.1 R1.2 U4.1 | length 618.3
  Top Layer w8: R1.2@565,486.65 575,496.65 575,550 605,580 710,580 720,570 770,570 780,560 780,520 795,505 v2(845,505)
  Top Layer w15: D1.1 845,484.25 v2(845,505)
  Bottom Layer w15: 716.34,486.5 716.34,503.66 752.68,540 830,540 845,525 v2(845,505)
GND: C1.1 C2.1 C3.1 C4.1 C5.1 C6.1 C7.1 C8.2 C9.1 C10.1 C11.1 C20.1 C21.2 C22.1 C23.2 C28.1 C29.1 C30.1 C35.1 IC1.2 IC1.5 IC1.6 IC1.10 IC1.15 IC1.16 IC1.18 IC1.25 R2.1 R4.1 R9.1 R10.1 R12.1 R15.1 R17.2 R19.1 R29.2 R30.2 R31.2 R32.2 R38.1 R57.1 R58.1 R59.1 R60.1 S2.2 S3.2 U1.5 U1.6 U1.7 U1.8 U1.9 U1.10 U2.3 U2.4 U2.5 U3.3 U3.29 U4.3 U4.11 U5.5 U5.7 U6.33 U6.49 U6.51 U7.1 U7.15 U7.38 U7.39 | length 4775.3
  Top Layer w8: v1(100,80) C28.1@100,112.68 ; C30.1 C35.1 98.35,1179.33 R60.1 98.35,1238.35 135,1275 v1(190,1275) ; v3(140,250.16) 213.84,250.16 S2.2 ; S3.2 254,365 v3(270,365) 278.35,373.35 R19.1 ; v1(235,1250) R59.1 288.35,1270 R58.1 ; C29.1 332.32,245 v3(380,245) ; v1(325,330) 336.65,330 R38.1 ; R4.1 435,540 445,550 545,550 555,540 v1(555,526.65) 555,521.65 R2.1 ; U6.51 558.27,1111.73 565,1105 590,1105 597.64,1112.64 U6.49 599.13,1165 v1(625,1165) ; C23.2 615,1267.32 615,1265 v1(610,1265) ; U6.33@665,793.86 690,768.86 v1(690,765) ; R29.2 v1(850,995) 851.65,993.35 R57.1 ; R32.2 R31.2 R30.2 v1(850,1085)
  Top Layer w10: U3.29@534.69,260.32 U3.3
  Top Layer w15: C1.1 C2.1 645,450 v2(670,450) ; C21.2 C22.1 680,1235 v2(670,1225) ; U2.3 809.43,293.43 ; v2(712.5,52.5) 772.5,52.5 U2.5 811,391.57 U2.4@804.57,398 ; C20.1 v2(855,1280)
  Bottom Layer w8: U7.38 123.5,1275 v1(190,1275) ; v3(140,250.16) R17.2 ; R17.2@146.34,278.98 IC1.15 IC1.16 198.59,310.47 208.23,320.11 208.23,341.77 200.16,349.84 IC1.18 ; C11.1 247.68,435 265,435 284.84,415.16 IC1.25 284.84,379.84 v3(270,365) ; IC1.10 284.84,309.84 305,330 v1(325,330) ; C8.2 352.32,245 v3(380,245) 380,265 366.02,278.98 IC1.6 IC1.5 339.53,310.47 325,325 v1(325,330) ; IC1.2 363.58,365.75 347.63,365.75 325,343.12 v1(325,330) ; C9.1 390,477.32 C6.1 C5.1 467.68,477.32 479,466 479,308.44 v2@480,307.44 ; C4.1 452.32,335.12 C3.1 ; R15.1 543.35,421.65 559,406 597.81,406 599.24,404.57 646.58,404.57 670,427.98 v2(670,450) U4.3 ; C10.1 602.68,207.68 636.22,174.14 U1.5@712.5,174.14 ; U1.5 U1.5@712.5,174.14 ; U1.10@817.5,341.5 817.5,108.5 712.5,108.5 U1.5@712.5,174.14
  Bottom Layer w10: C7.1 C10.1 ; v1(680,650) 681.22,648.78 U7.15 ; R9.1 R10.1 821.65,450 v1(840,450)
  Bottom Layer w15: R12.1 v2(62.44,542.44) ; U5.5 U5.7 v2@480,307.44 ; C3.1 v2@479,308.44 ; U7.39 670,1156.06 v2(670,1225) ; v2(712.5,52.5) U1.6@712.5,108.5 ; U7.1 851.93,1276.93 v2(855,1280)
  other v2: 470,315
IN1P: C34.1 R61.1 R62.1 R63.1 U6.16 | length 254.3
  Top Layer w12: R61.1 162.44,672.56 C34.1 144.09,690.91 R62.1 R63.1 145.2,775 167.56,797.36 U6.16
IO0: Q2.3 R37.1 U7.25 | length 831
  Top Layer w8: v1(60,350) 65,355 v1(65,450)
  Top Layer w10: Q2.3 R37.1@341.69,179.96
  Bottom Layer w8: v1(60,350) 60,205 120,145 v1(340,145) ; v1(65,450) 80,450 91.81,461.81 91.81,516.86 121.57,546.62 U7.25
IO0_1: C29.2 R37.2 S3.1 | length 277.1
  Top Layer w10: 100,310 125,285 260,285 288.35,256.65 R37.2
LED1: LED3.2 U7.30 | length 462.8
  Top Layer w8: v1(220,715) 250,685 250,596.5 LED3.2
  Bottom Layer w8: U7.30 173.07,876.93 195,855 195,740 v1(220,715)
LED2: LED4.2 U7.31 | length 570.7
  Top Layer w8: v1(225,745) 264,706 264,606 300,570 336.5,570 LED4.2
  Bottom Layer w8: U7.31 193.07,926.93 225,895 v1(225,745)
NB: IC1.4 R14.1 | length 55.5
  Bottom Layer w8: IC1.4 405.16,330.16 R14.1
NetC9_2: C9.2 IC1.27 Y1.2 | length 114.4
  Bottom Layer w8: IC1.27 Y1.2@324.21,462.72 ; Y1.2 358.82,452.68 C9.2
NetC11_2: C11.2 IC1.26 Y1.1 | length 118
  Bottom Layer w8: C11.2 Y1.1@261.18,487.32 ; Y1.1 304.53,443.98 IC1.26
NetC24_2: C24.2 U6.28 | length 112.1
  Top Layer w8: U6.28 518.9,686.1 530,675 545,675 565,655 C24.2
NetC25_1: C25.1 U6.30 | length 103.5
  Top Layer w8: U6.30 558.27,691.73 605,645 C25.1
NetC26_1: C26.1 U6.55 | length 71.4
  Top Layer w8: U6.55 479.53,1227.2 C26.1
NetC27_1: C27.1 U6.26 | length 116.8
  Top Layer w8: U6.26 479.53,680.47 485,675 505,675 530,650 C27.1
NetC30_2: C30.2 U6.64 | length 168.9
  Top Layer w8: C30.2 268.86,1130 U6.64
NetC31_1: C31.1 R41.1 R61.2 | length 94.9
  Top Layer w12: R41.1 C31.1 R61.2@202.44,625
NetC32_2: C32.2 C33.1 U6.24 | length 128.3
  Top Layer w12: U6.24 440.16,652.17 C32.2 C33.1
NetC35_2: C35.2 U6.63 | length 235.7
  Top Layer w8: C35.2 250,1165 295,1210 315,1210 322.05,1202.95 U6.63
NetIC1_17: IC1.17 R17.1 | length 40.9
  Bottom Layer w8: R17.1@145.47,330.16 IC1.17
NetLED1_1: LED1.1 R11.1 | length 228.1
  Top Layer w8: LED1.1 v1(865,540)
  Bottom Layer w8: R11.1 860,425 870,435 870,515.36 865,520.36 v1(865,540)
NetLED2_1: LED2.1 R16.1 | length 248.1
  Top Layer w8: v1(680,505) 675,505 691.5,521.5 LED2.1@691.5,555
  Bottom Layer w8: R16.1 543.35,478.7 599.64,535 620.36,535 635,520.36 635,520 650,505 v1(680,505)
NetLED3_1: LED3.1 R19.2 | length 49.2
  Top Layer w10: LED3.1 321.65,461.85 R19.2
NetLED4_1: LED4.1 R38.2 | length 46.9
  Top Layer w10: R38.2 LED4.1@378.35,461.85
NetQ1_1: Q1.1 R5.1 | length 422.4
  Top Layer w10: Q1.1 295.91,55 v1(315,55) ; R5.1 641.65,73.35 650,65 v1(650,55)
  Bottom Layer w10: v1(315,55) v1(650,55)
NetQ2_1: Q2.1 R6.1 | length 55.9
  Top Layer w10: Q2.1 R6.1@484.25,72.6
NetR1_1: R1.1 R2.2 U3.8 | length 106.4
  Top Layer w10: R2.2 530,443.35 R1.1@565,443.35 ; R1.1@565,433.11 574.06,424.06 U3.8
NetR3_2: R3.2 U3.9 | length 165.7
  Top Layer w10: R3.2@475,478.35 R3.2 475,430 485.8,419.2 512.4,419.2 528.4,403.2 545.15,403.2 551.59,396.76 551.59,372.52 U3.9
NetR4_2: R4.2 U3.11 | length 157.7
  Top Layer w10: R4.2@430.64,478.35 430.64,449.36 476.8,403.2 505.78,403.2 515,393.98 U3.11
NetR9_2: R9.2 U4.2 | length 70.7
  Bottom Layer w8: U4.2 727.45,465.75 735.12,473.42 735.12,477.49 744.44,486.81 745.16,486.81 R9.2
NetR10_2: R10.2 U4.4 | length 64.7
  Bottom Layer w8: U4.4 729.25,434.25 760,465 R10.2
NetR11_2: R11.2 U4.5 | length 67.7
  Bottom Layer w8: U4.5 769.84,418.5 R11.2
NetR15_2: R15.2 U4.7 | length 37.8
  Bottom Layer w8: R15.2@590.91,434.25 U4.7
NetR16_2: R16.2 U4.8 | length 48.2
  Bottom Layer w8: R16.2 599.84,451.81 613.19,451.81 615,450 U4.8
NetR22_2: R22.2 U6.36 | length 335.6
  Top Layer w8: U6.36 708.38,856.42 735,829.8 735,720 795,660 846.65,660 R22.2
NetR23_2: R23.2 U6.35 | length 250.5
  Top Layer w8: U6.35 708.27,836.73 720,825 720,645 R23.2@730,635
NetR24_1: R24.1 U6.40 | length 154.4
  Top Layer w8: U6.40 773.19,935.16 R24.1
NetR25_1: R25.1 U6.34 | length 332.4
  Top Layer w8: U6.34 627.05,817.05 615,805 615,750 705,660 705,615 725,595 R25.1
NetR26_1: R26.1 U6.43 | length 115.5
  Top Layer w8: U6.43 719.21,994.21 R26.1@765,1040
NetR27_1: R27.1 U6.47 | length 292.4
  Top Layer w8: U6.47 622.05,1072.95 610,1085 610,1105 695,1190 720,1190 745,1215 R27.1
NetR28_1: R28.1 U6.37 | length 277.2
  Top Layer w8: U6.37 718.9,876.1 750,845 750,735 783.35,701.65 806.69,701.65 R28.1
NetR29_1: R29.1 U6.42 | length 113.3
  Top Layer w8: U6.42 744.53,974.53 765,995 R29.1
NetR30_1: R30.1 U6.44 | length 135.6
  Top Layer w8: U6.44 713.9,1013.9 748.58,1048.58 748.58,1073.58 R30.1@760,1085
NetR31_1: R31.1 U6.45 | length 166.3
  Top Layer w8: U6.45 713.58,1033.58 734.58,1054.58 734.58,1091.24 R31.1
NetR32_1: R32.1 U6.46 | length 208
  Top Layer w8: U6.46 713.27,1053.27 720.58,1060.58 720.58,1150.58 745,1175 R32.1
NetR33_1: R33.1 R35.2 R36.2 | length 133
  Top Layer w12: R35.2 195,465 212.56,447.44 R33.1 255,447.44 R36.2
NetR34_2: R34.2 U6.52 | length 70.4
  Top Layer w8: U6.52 538.58,1231.93 R34.2
NetR35_1: pad.1 R35.1 R41.2 U8.2 | length 152.7
  Top Layer w12: R35.1@96.61,470.83 U8.2 R41.2@96.61,569.17 ; R35.1 102.44,442.56 pad.1
NetR43_2: R43.2 U6.14 | length 98.8
  Top Layer w8: R43.2 163.39,836.73 U6.14
NetR45_2: R45.2 U6.12 | length 96.5
  Top Layer w8: R45.2 157.76,876.1 U6.12
NetR47_2: R47.2 U6.10 | length 94.2
  Top Layer w8: R47.2 152.13,915.47 U6.10
NetR49_2: R49.2 U6.8 | length 91.8
  Top Layer w8: R49.2 146.5,954.84 U6.8
NetR51_2: R51.2 U6.6 | length 89.1
  Top Layer w8: R51.2@142.44,994.21 U6.6
NetR53_2: R53.2 U6.4 | length 83.4
  Top Layer w8: R53.2@148.07,1033.58 U6.4
NetR55_2: R55.2 U6.2 | length 94.8
  Top Layer w8: R55.2 153.7,1072.95 U6.2
NetR57_2: R57.2 U6.41 | length 134.7
  Top Layer w8: U6.41 R57.2@803.19,954.84
NetR58_2: R58.2 U6.60 | length 141.6
  Top Layer w8: R58.2 381.1,1270.55 U6.60
NetR59_2: R59.2 U6.61 | length 98.8
  Top Layer w8: R59.2 331.65,1238.35 361.42,1208.58 U6.61
NetR60_2: R60.2 U6.62 | length 256.2
  Top Layer w8: R60.2 270,1205 289,1224 320.8,1224 341.73,1203.07 U6.62
NetS1_C1: S1.C1 U2.1 | length 296.8
  Top Layer w15: v2(610,165) 670,165 U2.1
  Bottom Layer w15: S1.C1@462.5,158.52 S1.C1 473.98,147.05 473.98,136.02 495,115 558.84,115 610,166.16 v2(610,165)
RST: IC1.11 R13.1 | length 38.5
  Bottom Layer w8: R13.1@265.16,240.47 IC1.11
RTS: Q1.2 R6.2 U3.24 | length 333.4
  Top Layer w10: Q1.2 278.31,124.36 316.67,86 386,86 395.41,95.41 463.76,95.41 R6.2 495.31,126.97 U3.24
RXD: R8.2 U3.25 | length 77
  Top Layer w10: U3.25 515,131.65 R8.2
RXD0: R7.1 U7.34 | length 1674.6
  Top Layer w8: 20,85 20,1030 v1(40,1050)
  Top Layer w10: 20,85 87,18 519.65,18 R7.1
  Bottom Layer w8: v1@40,1055 61.93,1076.93 U7.34
  Bottom Layer w10: v1(40,1050) v1@40,1055
SCL: IC1.19 R40.1 U7.36 | length 1028.6
  Bottom Layer w8: U7.36 71.93,1176.93 20,1125 20,430 45,405 135.2,405 146.65,393.55 R40.1 ; R40.1@141.18,369.53 IC1.19
SDA: IC1.20 R39.1 U7.33 | length 839.8
  Bottom Layer w8: U7.33 96.93,1026.93 35,965 35,440 55,420 148.35,420 ; R39.1 148.35,420 ; IC1.20 167.32,401.02 148.35,420
TXD: R7.2 U3.26 | length 87.5
  Top Layer w10: U3.26 534.69,156.97 R7.2
TXD0: R8.1 U7.35 | length 1627.6
  Top Layer w8: 35,100 35,1015.3 65,1045.3 v1(65,1115)
  Top Layer w10: 35,100 101,34 490.65,34 R8.1
  Bottom Layer w8: v1(65,1115) 75,1125 U7.35@119.65,1125
  Bottom Layer w10: U7.35@119.65,1125 U7.35
USB_DN: U1.2 U3.5 | length 138.4
  Top Layer w10: U3.5 645.31,299.68 645,299.37 v1(645,295)
  Bottom Layer w10: v1(645,295) 689.09,250.91 U1.2
USB_DP: U1.3 U3.4 | length 134.8
  Top Layer w10: U3.4 628.98,280 645,263.98 v1(645,255)
  Bottom Layer w10: v1(645,255) 645,251.77 671.45,225.32 U1.3@712.5,225.32
V_33: C1.2 C2.2 C4.2 C5.2 C6.2 C7.2 C10.2 C20.2 C21.1 C22.2 C23.1 IC1.3 IC1.28 R3.1 R13.2 R14.2 R20.1 R21.1 R22.1 R23.1 R34.1 R39.2 R40.2 U3.6 U3.7 U5.3 U6.48 U6.50 U7.2 | length 1744.9
  Top Layer w8: R3.1 511.65,516.65 v1(525,530) ; R34.1 540,1295 v1(550,1305) ; U6.50 C23.1@577.95,1230.63 ; C23.1 617.68,1232.68 625,1225.35 v1(625,1225) ; U6.48 v1(668.5,1118.5) ; R23.1 833.35,630 R22.1 v1(855,570) ; v1(850,735) R21.1@850,768.35 ; R20.1@850,841.65 v1(850,870)
  Top Layer w15: v2(605,1305) 612.68,1297.32 C21.1 C22.2 717.24,1297.32 C20.2 ; C1.2 C2.2 605.35,434.65 645,395 v2(645,375) 645,360 624.06,339.06 U3.7 U3.6
  Bottom Layer w8: R40.2 103.35,236.65 115,225 v3(180,225) 180,235 190,225 210.31,225 R13.2 ; v1(190,430) R39.2@190,458.35 ; IC1.3 405.16,349.84 R14.2 417.68,362.36 C4.2 417.68,428.88 ; C6.2@417.68,442.68 417.68,435.35 C6.2
  Bottom Layer w10: v1(305,350) 306.46,350 345,388.54 345,415.71 358.17,428.88 417.68,428.88 ; C6.2@417.68,442.68 C6.2 C5.2
  Bottom Layer w15: U5.3 617.36,234.41 650,201.77 v2(650,200) ; v2(605,1305) 680,1305 758.07,1226.93 U7.2
VBUS: D1.2 U1.1 | length 281.9
  Top Layer w15: v2(710,385) 710,465 725,480 D1.2
  Bottom Layer w15: v2(710,385) 698.35,385 673.44,360.09 673.44,298.91 695.85,276.5 U1.1@712.5,276.5
VOUT: C3.2 LED1.2 LED2.2 S1.2 U4.10 U5.2 U5.4 U5.6 | length 1139.6
  Top Layer w8: LED2.2@628.5,555 630,553.5 610,533.5 v2(610,510) 622.93,497.07 623.06,497.2 656.94,497.2 669.14,485 693.5,485 LED1.2
  VDD w15: v2(380,210) 430,210 520,300 520,420 v2(610,510)
  Bottom Layer w8: U5.6 430.59,285.59 420,275 420,245 430.59,234.41 U5.4 450,233.07 450,210
  Bottom Layer w15: v2(380,210) 403.07,210 ; S1.2 403.07,210 ; C3.2 515,327.56 515,308.03 504.06,297.09 504.06,260 ; U5.2 504.06,260 ; v2(610,510) 628.66,491.34 U4.10@628.66,483.18 ; 403.07,210 450,210 488.46,210 504.06,225.6 504.06,260
pads on no net: IC1.1 IC1.7 IC1.8 IC1.12 IC1.13 IC1.14 IC1.21 IC1.22 IC1.23 IC1.24 R28.2 R43.1 R45.1 R47.1 R49.1 R51.1 R53.1 R55.1 S1.1 S1.MP1 S1.MP2 U1.4 U1.11 U2.2 U3.1 U3.2 U3.10 U3.12 U3.13 U3.14 U3.15 U3.16 U3.17 U3.18 U3.19 U3.20 U3.21 U3.22 U4.6 U4.9 U6.17 U6.18 U6.27 U6.29 U7.4 U7.5 U7.6 U7.7 U7.8 U7.9 U7.10 U7.17 U7.18 U7.19 U7.20 U7.21 U7.22 U7.24 U7.26 U7.27 U7.28 U7.29 U7.32 U7.37

## Polygon pours and split planes (outlines as drawn)
GND on GND "AGND" (solid, remove dead copper, pour order 10): 10,585 85,585 100,570 100,480 130,450 330,450 680,660 680,1050 515,1215 10,1215 10,1320 905,1320 905,10 10,10
AGND on GND "AGND" (solid, remove dead copper, pour order 0): 10,600 95,600 115,580 115,490 135,470 325,470 660,670.93 660,1035 500,1195 10,1195
no net on GND "AGND" (solid, remove dead copper, pour order 4): -25,1215
V_33 on VDD "AGND" (solid, remove dead copper, pour order 12): 10,585 85,585 100,570 100,480 130,450 320,450 625,625 680,660 655,644.09 680,660 680,1050 515,1215 10,1215 10,1320 905,1320 905,10 10,10
AV_33 on VDD "AGND" (solid, remove dead copper, pour order 6): 10,600 95,600 115,580 115,490 135,470 325,470 660,670 660,1035 500,1195 10,1195
AGND on Bottom Layer "AGND" (solid, remove dead copper, pour order 20): 10,600 95,600 115,580 115,490 135,470 325,470 660,670.93 660,1035 500,1195 10,1195
GND on Bottom Layer "AGND" (solid, remove dead copper, pour order 16): 10,585 85,585 100,570 100,480 130,450 330,450 680,660 680,1050 515,1215 10,1215 10,1320 905,1320 905,10 10,10
AGND on Top Layer "AGND" (solid, remove dead copper, pour order 18): 10,600 95,600 115,580 115,490 135,470 325,470 660,670.93 660,1035 500,1195 10,1195
GND on Top Layer "DGND" (solid, remove dead copper, pour order 14): 10,585 85,585 100,570 100,480 130,450 330,450 680,660 680,1050 515,1215 10,1215 10,1320 905,1320 905,10 10,10

## Silkscreen, mask and mechanical layers (free items; w line width, h text height)
Mechanical 1:
  lines w8: 0,0 105,0 915,0 915,1330 0,1330 0,0